# EAGLE board 14077-gatorBytes_button_board-panel-big (EAGLE 9.0.1)
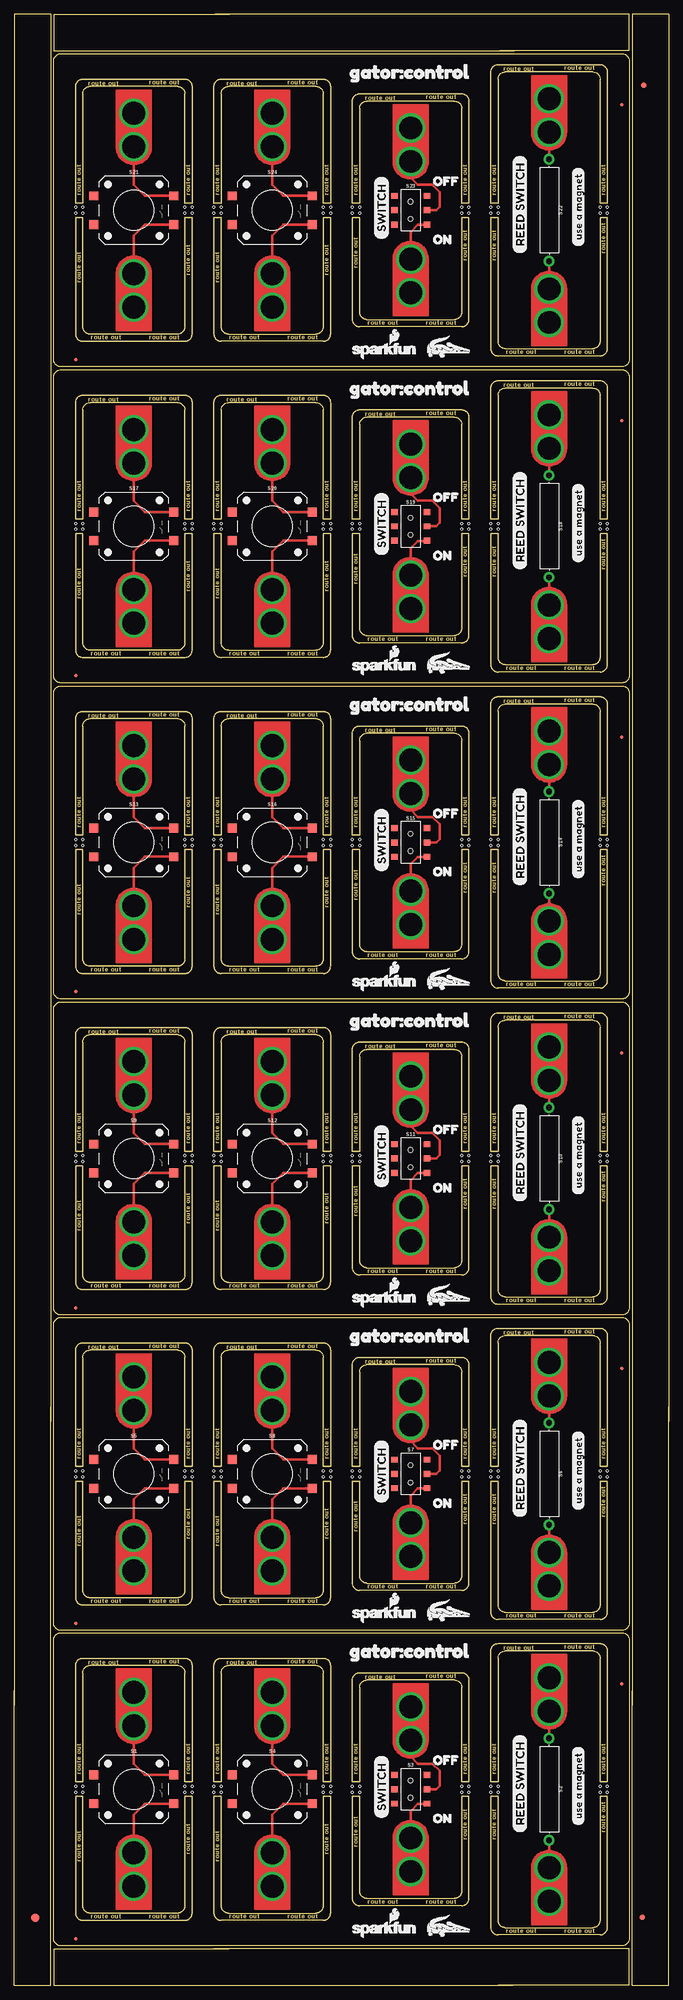
[diagram p0: board, top side]
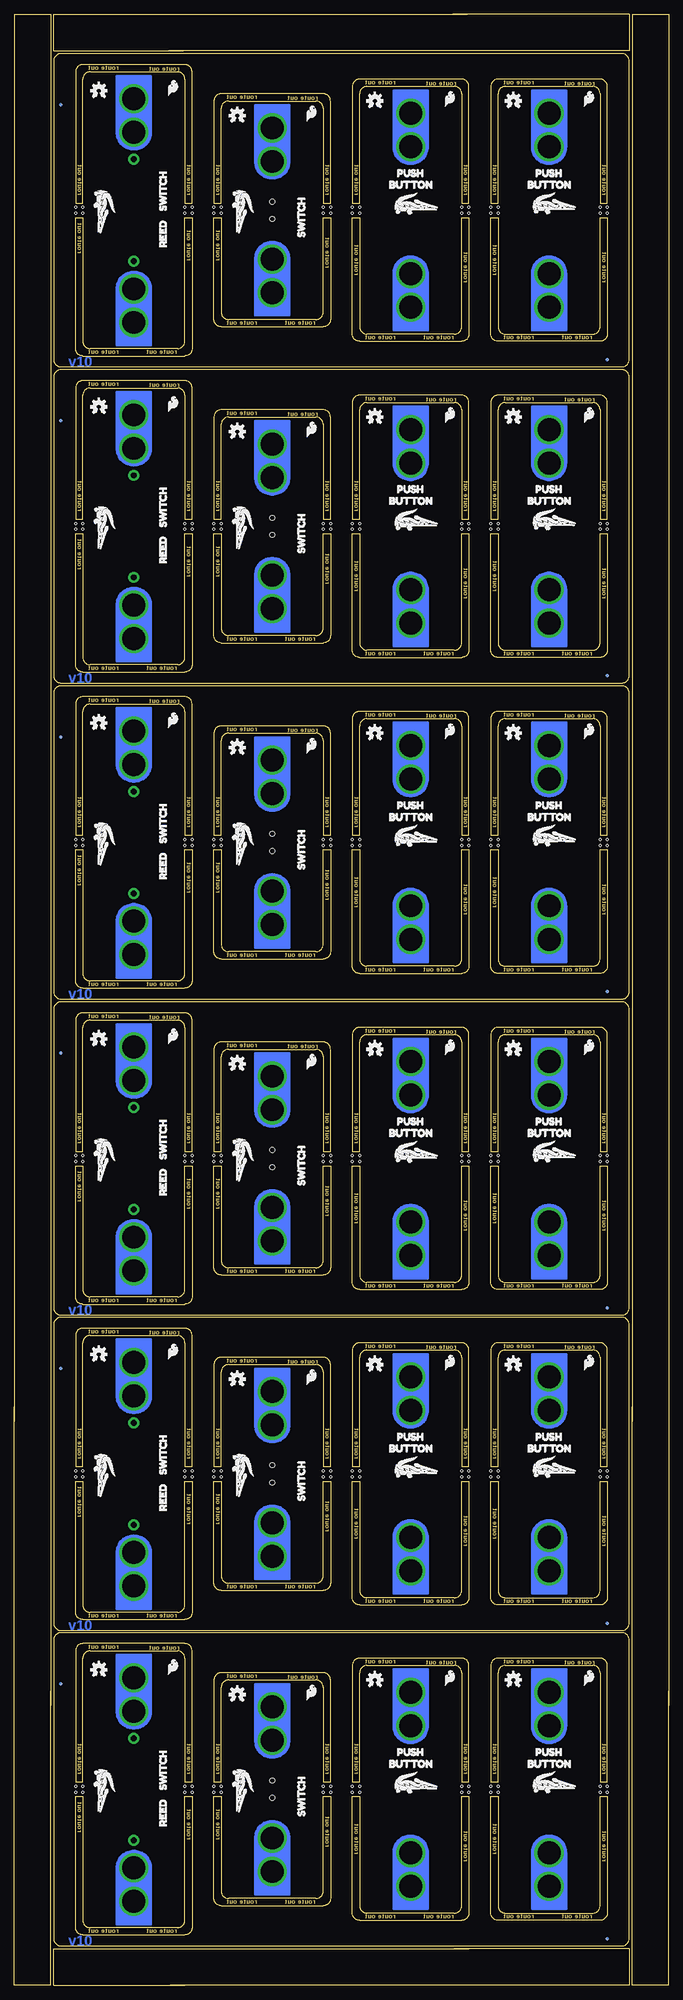
[diagram p1: board, bottom side, seen from below]

Size 114.05 x 343.66 mm. Coordinates in mm from the lower left corner, seen from the top.
Outline: 114.05,100.84 114.05,0 107.7,0 107.7,51.31
Outline: 107.7,48.77 107.7,343.66 114.05,343.66 114.05,98.3
Outline: 6.35,100.84 6.35,0 0,0 0,51.31
Outline: 0,48.77 0,343.66 6.35,343.66 6.35,98.3
Outline: 35.05,343.66 107.19,343.66 107.19,337.31 84.58,337.31
Outline: 87.12,337.31 6.86,337.31 6.86,343.66 37.59,343.66
Outline: 34.8,6.35 107.19,6.35 107.19,0 84.33,0
Outline: 86.87,0 6.86,0 6.86,6.35 37.34,6.35
Outline: 8.13,6.86 arc-90 6.86,8.13 6.86,60.2 arc-90 8.13,61.47 105.92,61.47 arc-90 107.19,60.2 107.19,8.13 arc-90 105.92,6.86 8.13,6.86
Outline: 28.45,55.75 arc-90 29.72,54.48 29.72,35.43 30.99,35.43 30.99,55.75 arc90 29.72,57.02 11.94,57.02 arc90 10.67,55.75 10.67,35.43 11.94,35.43 11.94,54.48 arc-90 13.21,55.75 28.45,55.75
Outline: 29.72,13.84 arc-90 28.45,12.57 13.21,12.57 arc-90 11.94,13.84 11.94,32.89 10.67,32.89 10.67,12.57 arc90 11.94,11.3 29.72,11.3 arc90 30.99,12.57 30.99,32.89 29.72,32.89 29.72,13.84
Outline: 52.58,55.75 arc-90 53.85,54.48 53.85,35.43 55.12,35.43 55.12,55.75 arc90 53.85,57.02 36.07,57.02 arc90 34.8,55.75 34.8,35.43 36.07,35.43 36.07,54.48 arc-90 37.34,55.75 52.58,55.75
Outline: 53.85,13.84 arc-90 52.58,12.57 37.34,12.57 arc-90 36.07,13.84 36.07,32.89 34.8,32.89 34.8,12.57 arc90 36.07,11.3 53.85,11.3 arc90 55.12,12.57 55.12,32.89 53.85,32.89 53.85,13.84
Outline: 76.71,53.21 arc-90 77.98,51.94 77.98,35.43 79.25,35.43 79.25,53.21 arc90 77.98,54.48 60.2,54.48 arc90 58.93,53.21 58.93,35.43 60.2,35.43 60.2,51.94 arc-90 61.47,53.21 76.71,53.21
Outline: 77.98,16.38 arc-90 76.71,15.11 61.47,15.11 arc-90 60.2,16.38 60.2,32.89 58.93,32.89 58.93,15.11 arc90 60.2,13.84 77.98,13.84 arc90 79.25,15.11 79.25,32.89 77.98,32.89 77.98,16.38
Outline: 100.84,58.29 arc-90 102.11,57.02 102.11,35.43 103.38,35.43 103.38,58.29 arc90 102.11,59.56 84.33,59.56 arc90 83.06,58.29 83.06,35.43 84.33,35.43 84.33,57.02 arc-90 85.6,58.29 100.84,58.29
Outline: 102.11,11.3 arc-90 100.84,10.03 85.6,10.03 arc-90 84.33,11.3 84.33,32.89 83.06,32.89 83.06,10.03 arc90 84.33,8.76 102.11,8.76 arc90 103.38,10.03 103.38,32.89 102.11,32.89 102.11,11.3
Outline: 8.13,61.85 arc-90 6.86,63.12 6.86,115.19 arc-90 8.13,116.46 105.92,116.46 arc-90 107.19,115.19 107.19,63.12 arc-90 105.92,61.85 8.13,61.85
Outline: 28.45,110.74 arc-90 29.72,109.47 29.72,90.42 30.99,90.42 30.99,110.74 arc90 29.72,112.01 11.94,112.01 arc90 10.67,110.74 10.67,90.42 11.94,90.42 11.94,109.47 arc-90 13.21,110.74 28.45,110.74
Outline: 29.72,68.83 arc-90 28.45,67.56 13.21,67.56 arc-90 11.94,68.83 11.94,87.88 10.67,87.88 10.67,67.56 arc90 11.94,66.29 29.72,66.29 arc90 30.99,67.56 30.99,87.88 29.72,87.88 29.72,68.83
Outline: 52.58,110.74 arc-90 53.85,109.47 53.85,90.42 55.12,90.42 55.12,110.74 arc90 53.85,112.01 36.07,112.01 arc90 34.8,110.74 34.8,90.42 36.07,90.42 36.07,109.47 arc-90 37.34,110.74 52.58,110.74
Outline: 53.85,68.83 arc-90 52.58,67.56 37.34,67.56 arc-90 36.07,68.83 36.07,87.88 34.8,87.88 34.8,67.56 arc90 36.07,66.29 53.85,66.29 arc90 55.12,67.56 55.12,87.88 53.85,87.88 53.85,68.83
Outline: 76.71,108.2 arc-90 77.98,106.93 77.98,90.42 79.25,90.42 79.25,108.2 arc90 77.98,109.47 60.2,109.47 arc90 58.93,108.2 58.93,90.42 60.2,90.42 60.2,106.93 arc-90 61.47,108.2 76.71,108.2
Outline: 77.98,71.37 arc-90 76.71,70.1 61.47,70.1 arc-90 60.2,71.37 60.2,87.88 58.93,87.88 58.93,70.1 arc90 60.2,68.83 77.98,68.83 arc90 79.25,70.1 79.25,87.88 77.98,87.88 77.98,71.37
Outline: 100.84,113.28 arc-90 102.11,112.01 102.11,90.42 103.38,90.42 103.38,113.28 arc90 102.11,114.55 84.33,114.55 arc90 83.06,113.28 83.06,90.42 84.33,90.42 84.33,112.01 arc-90 85.6,113.28 100.84,113.28
Outline: 102.11,66.29 arc-90 100.84,65.02 85.6,65.02 arc-90 84.33,66.29 84.33,87.88 83.06,87.88 83.06,65.02 arc90 84.33,63.75 102.11,63.75 arc90 103.38,65.02 103.38,87.88 102.11,87.88 102.11,66.29
Outline: 8.13,116.84 arc-90 6.86,118.11 6.86,170.18 arc-90 8.13,171.45 105.92,171.45 arc-90 107.19,170.18 107.19,118.11 arc-90 105.92,116.84 8.13,116.84
Outline: 28.45,165.74 arc-90 29.72,164.47 29.72,145.41 30.99,145.41 30.99,165.74 arc90 29.72,167 11.94,167 arc90 10.67,165.74 10.67,145.41 11.94,145.41 11.94,164.47 arc-90 13.21,165.74 28.45,165.74
Outline: 29.72,123.83 arc-90 28.45,122.56 13.21,122.56 arc-90 11.94,123.83 11.94,142.88 10.67,142.88 10.67,122.56 arc90 11.94,121.29 29.72,121.29 arc90 30.99,122.56 30.99,142.88 29.72,142.88 29.72,123.83
Outline: 52.58,165.74 arc-90 53.85,164.47 53.85,145.41 55.12,145.41 55.12,165.74 arc90 53.85,167 36.07,167 arc90 34.8,165.74 34.8,145.41 36.07,145.41 36.07,164.47 arc-90 37.34,165.74 52.58,165.74
Outline: 53.85,123.83 arc-90 52.58,122.56 37.34,122.56 arc-90 36.07,123.83 36.07,142.88 34.8,142.88 34.8,122.56 arc90 36.07,121.29 53.85,121.29 arc90 55.12,122.56 55.12,142.88 53.85,142.88 53.85,123.83
Outline: 76.71,163.19 arc-90 77.98,161.93 77.98,145.41 79.25,145.41 79.25,163.19 arc90 77.98,164.47 60.2,164.47 arc90 58.93,163.19 58.93,145.41 60.2,145.41 60.2,161.93 arc-90 61.47,163.19 76.71,163.19
Outline: 77.98,126.37 arc-90 76.71,125.09 61.47,125.09 arc-90 60.2,126.37 60.2,142.88 58.93,142.88 58.93,125.09 arc90 60.2,123.83 77.98,123.83 arc90 79.25,125.09 79.25,142.88 77.98,142.88 77.98,126.37
Outline: 100.84,168.28 arc-90 102.11,167 102.11,145.41 103.38,145.41 103.38,168.28 arc90 102.11,169.55 84.33,169.55 arc90 83.06,168.28 83.06,145.41 84.33,145.41 84.33,167 arc-90 85.6,168.28 100.84,168.28
Outline: 102.11,121.29 arc-90 100.84,120.02 85.6,120.02 arc-90 84.33,121.29 84.33,142.88 83.06,142.88 83.06,120.02 arc90 84.33,118.75 102.11,118.75 arc90 103.38,120.02 103.38,142.88 102.11,142.88 102.11,121.29
Outline: 8.13,171.96 arc-90 6.86,173.23 6.86,225.3 arc-90 8.13,226.57 105.92,226.57 arc-90 107.19,225.3 107.19,173.23 arc-90 105.92,171.96 8.13,171.96
Outline: 28.45,220.85 arc-90 29.72,219.58 29.72,200.53 30.99,200.53 30.99,220.85 arc90 29.72,222.12 11.94,222.12 arc90 10.67,220.85 10.67,200.53 11.94,200.53 11.94,219.58 arc-90 13.21,220.85 28.45,220.85
Outline: 29.72,178.94 arc-90 28.45,177.67 13.21,177.67 arc-90 11.94,178.94 11.94,197.99 10.67,197.99 10.67,177.67 arc90 11.94,176.4 29.72,176.4 arc90 30.99,177.67 30.99,197.99 29.72,197.99 29.72,178.94
Outline: 52.58,220.85 arc-90 53.85,219.58 53.85,200.53 55.12,200.53 55.12,220.85 arc90 53.85,222.12 36.07,222.12 arc90 34.8,220.85 34.8,200.53 36.07,200.53 36.07,219.58 arc-90 37.34,220.85 52.58,220.85
Outline: 53.85,178.94 arc-90 52.58,177.67 37.34,177.67 arc-90 36.07,178.94 36.07,197.99 34.8,197.99 34.8,177.67 arc90 36.07,176.4 53.85,176.4 arc90 55.12,177.67 55.12,197.99 53.85,197.99 53.85,178.94
Outline: 76.71,218.31 arc-90 77.98,217.04 77.98,200.53 79.25,200.53 79.25,218.31 arc90 77.98,219.58 60.2,219.58 arc90 58.93,218.31 58.93,200.53 60.2,200.53 60.2,217.04 arc-90 61.47,218.31 76.71,218.31
Outline: 77.98,181.48 arc-90 76.71,180.21 61.47,180.21 arc-90 60.2,181.48 60.2,197.99 58.93,197.99 58.93,180.21 arc90 60.2,178.94 77.98,178.94 arc90 79.25,180.21 79.25,197.99 77.98,197.99 77.98,181.48
Outline: 100.84,223.39 arc-90 102.11,222.12 102.11,200.53 103.38,200.53 103.38,223.39 arc90 102.11,224.66 84.33,224.66 arc90 83.06,223.39 83.06,200.53 84.33,200.53 84.33,222.12 arc-90 85.6,223.39 100.84,223.39
Outline: 102.11,176.4 arc-90 100.84,175.13 85.6,175.13 arc-90 84.33,176.4 84.33,197.99 83.06,197.99 83.06,175.13 arc90 84.33,173.86 102.11,173.86 arc90 103.38,175.13 103.38,197.99 102.11,197.99 102.11,176.4
Outline: 8.13,227.08 arc-90 6.86,228.35 6.86,280.42 arc-90 8.13,281.69 105.92,281.69 arc-90 107.19,280.42 107.19,228.35 arc-90 105.92,227.08 8.13,227.08
Outline: 28.45,275.97 arc-90 29.72,274.7 29.72,255.65 30.99,255.65 30.99,275.97 arc90 29.72,277.24 11.94,277.24 arc90 10.67,275.97 10.67,255.65 11.94,255.65 11.94,274.7 arc-90 13.21,275.97 28.45,275.97
Outline: 29.72,234.06 arc-90 28.45,232.79 13.21,232.79 arc-90 11.94,234.06 11.94,253.11 10.67,253.11 10.67,232.79 arc90 11.94,231.52 29.72,231.52 arc90 30.99,232.79 30.99,253.11 29.72,253.11 29.72,234.06
Outline: 52.58,275.97 arc-90 53.85,274.7 53.85,255.65 55.12,255.65 55.12,275.97 arc90 53.85,277.24 36.07,277.24 arc90 34.8,275.97 34.8,255.65 36.07,255.65 36.07,274.7 arc-90 37.34,275.97 52.58,275.97
Outline: 53.85,234.06 arc-90 52.58,232.79 37.34,232.79 arc-90 36.07,234.06 36.07,253.11 34.8,253.11 34.8,232.79 arc90 36.07,231.52 53.85,231.52 arc90 55.12,232.79 55.12,253.11 53.85,253.11 53.85,234.06
Outline: 76.71,273.43 arc-90 77.98,272.16 77.98,255.65 79.25,255.65 79.25,273.43 arc90 77.98,274.7 60.2,274.7 arc90 58.93,273.43 58.93,255.65 60.2,255.65 60.2,272.16 arc-90 61.47,273.43 76.71,273.43
Outline: 77.98,236.6 arc-90 76.71,235.33 61.47,235.33 arc-90 60.2,236.6 60.2,253.11 58.93,253.11 58.93,235.33 arc90 60.2,234.06 77.98,234.06 arc90 79.25,235.33 79.25,253.11 77.98,253.11 77.98,236.6
Outline: 100.84,278.51 arc-90 102.11,277.24 102.11,255.65 103.38,255.65 103.38,278.51 arc90 102.11,279.78 84.33,279.78 arc90 83.06,278.51 83.06,255.65 84.33,255.65 84.33,277.24 arc-90 85.6,278.51 100.84,278.51
Outline: 102.11,231.52 arc-90 100.84,230.25 85.6,230.25 arc-90 84.33,231.52 84.33,253.11 83.06,253.11 83.06,230.25 arc90 84.33,228.98 102.11,228.98 arc90 103.38,230.25 103.38,253.11 102.11,253.11 102.11,231.52
Outline: 8.13,282.19 arc-90 6.86,283.46 6.86,335.53 arc-90 8.13,336.8 105.92,336.8 arc-90 107.19,335.53 107.19,283.46 arc-90 105.92,282.19 8.13,282.19
Outline: 28.45,331.09 arc-90 29.72,329.82 29.72,310.77 30.99,310.77 30.99,331.09 arc90 29.72,332.36 11.94,332.36 arc90 10.67,331.09 10.67,310.77 11.94,310.77 11.94,329.82 arc-90 13.21,331.09 28.45,331.09
Outline: 29.72,289.18 arc-90 28.45,287.91 13.21,287.91 arc-90 11.94,289.18 11.94,308.23 10.67,308.23 10.67,287.91 arc90 11.94,286.64 29.72,286.64 arc90 30.99,287.91 30.99,308.23 29.72,308.23 29.72,289.18
Outline: 52.58,331.09 arc-90 53.85,329.82 53.85,310.77 55.12,310.77 55.12,331.09 arc90 53.85,332.36 36.07,332.36 arc90 34.8,331.09 34.8,310.77 36.07,310.77 36.07,329.82 arc-90 37.34,331.09 52.58,331.09
Outline: 53.85,289.18 arc-90 52.58,287.91 37.34,287.91 arc-90 36.07,289.18 36.07,308.23 34.8,308.23 34.8,287.91 arc90 36.07,286.64 53.85,286.64 arc90 55.12,287.91 55.12,308.23 53.85,308.23 53.85,289.18
Outline: 76.71,328.55 arc-90 77.98,327.28 77.98,310.77 79.25,310.77 79.25,328.55 arc90 77.98,329.82 60.2,329.82 arc90 58.93,328.55 58.93,310.77 60.2,310.77 60.2,327.28 arc-90 61.47,328.55 76.71,328.55
Outline: 77.98,291.72 arc-90 76.71,290.45 61.47,290.45 arc-90 60.2,291.72 60.2,308.23 58.93,308.23 58.93,290.45 arc90 60.2,289.18 77.98,289.18 arc90 79.25,290.45 79.25,308.23 77.98,308.23 77.98,291.72
Outline: 100.84,333.63 arc-90 102.11,332.36 102.11,310.77 103.38,310.77 103.38,333.63 arc90 102.11,334.9 84.33,334.9 arc90 83.06,333.63 83.06,310.77 84.33,310.77 84.33,332.36 arc-90 85.6,333.63 100.84,333.63
Outline: 102.11,286.64 arc-90 100.84,285.37 85.6,285.37 arc-90 84.33,286.64 84.33,308.23 83.06,308.23 83.06,285.37 arc90 84.33,284.1 102.11,284.1 arc90 103.38,285.37 103.38,308.23 102.11,308.23 102.11,286.64
Copper layers (1*16): Top 0.035mm / dielectric 1.5mm / Bottom 0.035mm
Design rules "SparkFun-2-layer-TIGHT": minimum track width 7mil, minimum drill 15mil, track to track 7mil, track to pad 7mil, pad to pad 7mil, via to via 7mil, smd to smd 7mil, copper to edge 7mil, drill to drill 7mil, minimum pad ring 7mil, minimum via ring 7mil, stop-mask expansion 4mil, vias tented up to drill 25mil, thermal gap 10mil
Holes 0.38 mm at 102.11,34.67 102.11,33.66 84.33,33.66 84.33,34.67 60.2,33.66 60.2,34.67 53.85,33.66 53.85,34.67 36.07,33.66 36.07,34.67 29.72,33.66 29.72,34.67 11.94,33.66 11.94,34.67 34.8,34.67 34.8,33.66 30.99,34.67 30.99,33.66 10.67,34.67 10.67,33.66 55.12,34.67 55.12,33.66 58.93,34.67 58.93,33.66 83.06,34.67 79.25,34.67 77.98,34.67 83.06,33.66 79.25,33.66 77.98,33.66 103.38,34.67 103.38,33.66 102.11,89.66 102.11,88.65 84.33,88.65 84.33,89.66 60.2,88.65 60.2,89.66 53.85,88.65 53.85,89.66 36.07,88.65 36.07,89.66 29.72,88.65 29.72,89.66 11.94,88.65 11.94,89.66 34.8,89.66 34.8,88.65 30.99,89.66 30.99,88.65 10.67,89.66 10.67,88.65 55.12,89.66 55.12,88.65 58.93,89.66 58.93,88.65 83.06,89.66 79.25,89.66 77.98,89.66 83.06,88.65 79.25,88.65 77.98,88.65 103.38,89.66 103.38,88.65 102.11,144.65 102.11,143.64 84.33,143.64 84.33,144.65 60.2,143.64 60.2,144.65 53.85,143.64 53.85,144.65 36.07,143.64 36.07,144.65 29.72,143.64 29.72,144.65 11.94,143.64 11.94,144.65 34.8,144.65 34.8,143.64 30.99,144.65 30.99,143.64 10.67,144.65 10.67,143.64 55.12,144.65 55.12,143.64 58.93,144.65 58.93,143.64 83.06,144.65 79.25,144.65 77.98,144.65 83.06,143.64 79.25,143.64 77.98,143.64 103.38,144.65 103.38,143.64 102.11,199.77 102.11,198.75 84.33,198.75 84.33,199.77 60.2,198.75 60.2,199.77 53.85,198.75 53.85,199.77 36.07,198.75 36.07,199.77 29.72,198.75 29.72,199.77 11.94,198.75 11.94,199.77 34.8,199.77 34.8,198.75 30.99,199.77 30.99,198.75 10.67,199.77 10.67,198.75 55.12,199.77 55.12,198.75 58.93,199.77 58.93,198.75 83.06,199.77 79.25,199.77 77.98,199.77 83.06,198.75 79.25,198.75 77.98,198.75 103.38,199.77 103.38,198.75 102.11,254.89 102.11,253.87 84.33,253.87 84.33,254.89 60.2,253.87 60.2,254.89 53.85,253.87 53.85,254.89 36.07,253.87 36.07,254.89 29.72,253.87 29.72,254.89 11.94,253.87 11.94,254.89 34.8,254.89 34.8,253.87 30.99,254.89 30.99,253.87 10.67,254.89 10.67,253.87 55.12,254.89 55.12,253.87 58.93,254.89 58.93,253.87 83.06,254.89 79.25,254.89 77.98,254.89 83.06,253.87 79.25,253.87 77.98,253.87 103.38,254.89 103.38,253.87 102.11,310.01 102.11,308.99 84.33,308.99 84.33,310.01 60.2,308.99 60.2,310.01 53.85,308.99 53.85,310.01 36.07,308.99 36.07,310.01 29.72,308.99 29.72,310.01 11.94,308.99 11.94,310.01 34.8,310.01 34.8,308.99 30.99,310.01 30.99,308.99 10.67,310.01 10.67,308.99 55.12,310.01 55.12,308.99 58.93,310.01 58.93,308.99 83.06,310.01 79.25,310.01 77.98,310.01 83.06,308.99 79.25,308.99 77.98,308.99 103.38,310.01 103.38,308.99

## Footprints (pad centres in the part's own frame; a part is rotated, then mirrored left to right if it is on the bottom)
FIDUCIAL-1X2 = smd 1 x 1: 1 0,0
FIDUCIAL-1.5X3 = smd 1.5 x 1.5: 1 0,0
FIDUCIAL-MICRO = smd 0.635 x 0.635: 1 0,0
TACTILE_SWITCH_SMD_12MM = smd 1.6 x 1.55: 1 6.975,-2.5; 2 -6.975,-2.5; 3 6.975,2.5; 4 -6.975,2.5
REED_SWITCH_PLASTIC = drill 1.016 pad 1.88: P$1 -8.89,0; P$2 8.89,0
SWITCH_DPDT_SMD_AYZ0202 = smd 1 x 1.15: 1 -2.5,2.825; 2 0,2.825; 3 2.5,2.825; 4 -2.5,-2.825; 5 0,-2.825; 6 2.5,-2.825 | hole 0.85: 1.5,0; -1.5,0
GATOR = drill 4 pad 5.08: P$1 0,-6.096; P$2 0,-0.254

## Placement (x,y rotation side)
E$1  [FIDUCIAL-1X2]  109.73,331.34 90 top
E$6  [FIDUCIAL-1.5X3]  3.68,11.75 180 top
E$7  [FIDUCIAL-1X2]  109.47,11.81 90 top
FD1  FIDUCIALUFIDUCIAL  [FIDUCIAL-MICRO]  105.92,52.58 0 top
FD2  FIDUCIALUFIDUCIAL  [FIDUCIAL-MICRO]  105.92,52.58 0 bottom
FD3  FIDUCIALUFIDUCIAL  [FIDUCIAL-MICRO]  10.67,8.13 0 bottom
FD4  FIDUCIALUFIDUCIAL  [FIDUCIAL-MICRO]  10.67,8.13 0 top
FD5  FIDUCIALUFIDUCIAL  [FIDUCIAL-MICRO]  105.92,107.57 0 top
FD6  FIDUCIALUFIDUCIAL  [FIDUCIAL-MICRO]  105.92,107.57 0 bottom
FD7  FIDUCIALUFIDUCIAL  [FIDUCIAL-MICRO]  10.67,63.12 0 bottom
FD8  FIDUCIALUFIDUCIAL  [FIDUCIAL-MICRO]  10.67,63.12 0 top
FD9  FIDUCIALUFIDUCIAL  [FIDUCIAL-MICRO]  105.92,162.56 0 top
FD10  FIDUCIALUFIDUCIAL  [FIDUCIAL-MICRO]  105.92,162.56 0 bottom
FD11  FIDUCIALUFIDUCIAL  [FIDUCIAL-MICRO]  10.67,118.11 0 bottom
FD12  FIDUCIALUFIDUCIAL  [FIDUCIAL-MICRO]  10.67,118.11 0 top
FD13  FIDUCIALUFIDUCIAL  [FIDUCIAL-MICRO]  105.92,217.68 0 top
FD14  FIDUCIALUFIDUCIAL  [FIDUCIAL-MICRO]  105.92,217.68 0 bottom
FD15  FIDUCIALUFIDUCIAL  [FIDUCIAL-MICRO]  10.67,173.23 0 bottom
FD16  FIDUCIALUFIDUCIAL  [FIDUCIAL-MICRO]  10.67,173.23 0 top
FD17  FIDUCIALUFIDUCIAL  [FIDUCIAL-MICRO]  105.92,272.8 0 top
FD18  FIDUCIALUFIDUCIAL  [FIDUCIAL-MICRO]  105.92,272.8 0 bottom
FD19  FIDUCIALUFIDUCIAL  [FIDUCIAL-MICRO]  10.67,228.35 0 bottom
FD20  FIDUCIALUFIDUCIAL  [FIDUCIAL-MICRO]  10.67,228.35 0 top
FD21  FIDUCIALUFIDUCIAL  [FIDUCIAL-MICRO]  105.92,327.91 0 top
FD22  FIDUCIALUFIDUCIAL  [FIDUCIAL-MICRO]  105.92,327.91 0 bottom
FD23  FIDUCIALUFIDUCIAL  [FIDUCIAL-MICRO]  10.67,283.46 0 bottom
FD24  FIDUCIALUFIDUCIAL  [FIDUCIAL-MICRO]  10.67,283.46 0 top
LOGO1  SFE_LOGO_FLAME.1_INCH  [SFE_LOGO_FLAME_.1]  63.37,49.4 0 bottom
LOGO2  OSHW-LOGOS  [OSHW-LOGO-S]  75.18,50.67 0 bottom
LOGO3  OSHW-LOGOS  [OSHW-LOGO-S]  51.18,53.21 0 bottom
LOGO4  SFE_LOGO_FLAME.1_INCH  [SFE_LOGO_FLAME_.1]  39.24,51.94 0 bottom
LOGO5  OSHW-LOGOS  [OSHW-LOGO-S]  27.05,53.21 0 bottom
LOGO6  SFE_LOGO_FLAME.1_INCH  [SFE_LOGO_FLAME_.1]  14.99,51.94 0 bottom
LOGO7  SFE_LOGO_FLAME.1_INCH  [SFE_LOGO_FLAME_.1]  87.5,53.85 0 bottom
LOGO8  OSHW-LOGOS  [OSHW-LOGO-S]  99.31,54.99 0 bottom
LOGO9  SFE_LOGO_FLAME.1_INCH  [SFE_LOGO_FLAME_.1]  63.37,104.39 0 bottom
LOGO10  OSHW-LOGOS  [OSHW-LOGO-S]  75.18,105.66 0 bottom
LOGO11  OSHW-LOGOS  [OSHW-LOGO-S]  51.18,108.2 0 bottom
LOGO12  SFE_LOGO_FLAME.1_INCH  [SFE_LOGO_FLAME_.1]  39.24,106.93 0 bottom
LOGO13  OSHW-LOGOS  [OSHW-LOGO-S]  27.05,108.2 0 bottom
LOGO14  SFE_LOGO_FLAME.1_INCH  [SFE_LOGO_FLAME_.1]  14.99,106.93 0 bottom
LOGO15  SFE_LOGO_FLAME.1_INCH  [SFE_LOGO_FLAME_.1]  87.5,108.84 0 bottom
LOGO16  OSHW-LOGOS  [OSHW-LOGO-S]  99.31,109.98 0 bottom
LOGO17  SFE_LOGO_FLAME.1_INCH  [SFE_LOGO_FLAME_.1]  63.37,159.38 0 bottom
LOGO18  OSHW-LOGOS  [OSHW-LOGO-S]  75.18,160.66 0 bottom
LOGO19  OSHW-LOGOS  [OSHW-LOGO-S]  51.18,163.19 0 bottom
LOGO20  SFE_LOGO_FLAME.1_INCH  [SFE_LOGO_FLAME_.1]  39.24,161.93 0 bottom
LOGO21  OSHW-LOGOS  [OSHW-LOGO-S]  27.05,163.19 0 bottom
LOGO22  SFE_LOGO_FLAME.1_INCH  [SFE_LOGO_FLAME_.1]  14.99,161.93 0 bottom
LOGO23  SFE_LOGO_FLAME.1_INCH  [SFE_LOGO_FLAME_.1]  87.5,163.83 0 bottom
LOGO24  OSHW-LOGOS  [OSHW-LOGO-S]  99.31,164.97 0 bottom
LOGO25  SFE_LOGO_FLAME.1_INCH  [SFE_LOGO_FLAME_.1]  63.37,214.5 0 bottom
LOGO26  OSHW-LOGOS  [OSHW-LOGO-S]  75.18,215.77 0 bottom
LOGO27  OSHW-LOGOS  [OSHW-LOGO-S]  51.18,218.31 0 bottom
LOGO28  SFE_LOGO_FLAME.1_INCH  [SFE_LOGO_FLAME_.1]  39.24,217.04 0 bottom
LOGO29  OSHW-LOGOS  [OSHW-LOGO-S]  27.05,218.31 0 bottom
LOGO30  SFE_LOGO_FLAME.1_INCH  [SFE_LOGO_FLAME_.1]  14.99,217.04 0 bottom
LOGO31  SFE_LOGO_FLAME.1_INCH  [SFE_LOGO_FLAME_.1]  87.5,218.95 0 bottom
LOGO32  OSHW-LOGOS  [OSHW-LOGO-S]  99.31,220.09 0 bottom
LOGO33  SFE_LOGO_FLAME.1_INCH  [SFE_LOGO_FLAME_.1]  63.37,269.62 0 bottom
LOGO34  OSHW-LOGOS  [OSHW-LOGO-S]  75.18,270.89 0 bottom
LOGO35  OSHW-LOGOS  [OSHW-LOGO-S]  51.18,273.43 0 bottom
LOGO36  SFE_LOGO_FLAME.1_INCH  [SFE_LOGO_FLAME_.1]  39.24,272.16 0 bottom
LOGO37  OSHW-LOGOS  [OSHW-LOGO-S]  27.05,273.43 0 bottom
LOGO38  SFE_LOGO_FLAME.1_INCH  [SFE_LOGO_FLAME_.1]  14.99,272.16 0 bottom
LOGO39  SFE_LOGO_FLAME.1_INCH  [SFE_LOGO_FLAME_.1]  87.5,274.07 0 bottom
LOGO40  OSHW-LOGOS  [OSHW-LOGO-S]  99.31,275.21 0 bottom
LOGO41  SFE_LOGO_FLAME.1_INCH  [SFE_LOGO_FLAME_.1]  63.37,324.74 0 bottom
LOGO42  OSHW-LOGOS  [OSHW-LOGO-S]  75.18,326.01 0 bottom
LOGO43  OSHW-LOGOS  [OSHW-LOGO-S]  51.18,328.55 0 bottom
LOGO44  SFE_LOGO_FLAME.1_INCH  [SFE_LOGO_FLAME_.1]  39.24,327.28 0 bottom
LOGO45  OSHW-LOGOS  [OSHW-LOGO-S]  27.05,328.55 0 bottom
LOGO46  SFE_LOGO_FLAME.1_INCH  [SFE_LOGO_FLAME_.1]  14.99,327.28 0 bottom
LOGO47  SFE_LOGO_FLAME.1_INCH  [SFE_LOGO_FLAME_.1]  87.5,329.18 0 bottom
LOGO48  OSHW-LOGOS  [OSHW-LOGO-S]  99.31,330.33 0 bottom
S1  MOMENTARY-SWITCH-SPST-SMD-12MM  [TACTILE_SWITCH_SMD_12MM]  20.83,34.16 0 top
S2  REED_SWITCH-PTH-INSULATED  [REED_SWITCH_PLASTIC]  93.22,34.16 270 top
S3  [SWITCH_DPDT_SMD_AYZ0202]  69.09,34.16 270 top
S4  MOMENTARY-SWITCH-SPST-SMD-12MM  [TACTILE_SWITCH_SMD_12MM]  44.96,34.16 0 top
S5  MOMENTARY-SWITCH-SPST-SMD-12MM  [TACTILE_SWITCH_SMD_12MM]  20.83,89.15 0 top
S6  REED_SWITCH-PTH-INSULATED  [REED_SWITCH_PLASTIC]  93.22,89.15 270 top
S7  [SWITCH_DPDT_SMD_AYZ0202]  69.09,89.15 270 top
S8  MOMENTARY-SWITCH-SPST-SMD-12MM  [TACTILE_SWITCH_SMD_12MM]  44.96,89.15 0 top
S9  MOMENTARY-SWITCH-SPST-SMD-12MM  [TACTILE_SWITCH_SMD_12MM]  20.83,144.15 0 top
S10  REED_SWITCH-PTH-INSULATED  [REED_SWITCH_PLASTIC]  93.22,144.15 270 top
S11  [SWITCH_DPDT_SMD_AYZ0202]  69.09,144.15 270 top
S12  MOMENTARY-SWITCH-SPST-SMD-12MM  [TACTILE_SWITCH_SMD_12MM]  44.96,144.15 0 top
S13  MOMENTARY-SWITCH-SPST-SMD-12MM  [TACTILE_SWITCH_SMD_12MM]  20.83,199.26 0 top
S14  REED_SWITCH-PTH-INSULATED  [REED_SWITCH_PLASTIC]  93.22,199.26 270 top
S15  [SWITCH_DPDT_SMD_AYZ0202]  69.09,199.26 270 top
S16  MOMENTARY-SWITCH-SPST-SMD-12MM  [TACTILE_SWITCH_SMD_12MM]  44.96,199.26 0 top
S17  MOMENTARY-SWITCH-SPST-SMD-12MM  [TACTILE_SWITCH_SMD_12MM]  20.83,254.38 0 top
S18  REED_SWITCH-PTH-INSULATED  [REED_SWITCH_PLASTIC]  93.22,254.38 270 top
S19  [SWITCH_DPDT_SMD_AYZ0202]  69.09,254.38 270 top
S20  MOMENTARY-SWITCH-SPST-SMD-12MM  [TACTILE_SWITCH_SMD_12MM]  44.96,254.38 0 top
S21  MOMENTARY-SWITCH-SPST-SMD-12MM  [TACTILE_SWITCH_SMD_12MM]  20.83,309.5 0 top
S22  REED_SWITCH-PTH-INSULATED  [REED_SWITCH_PLASTIC]  93.22,309.5 270 top
S23  [SWITCH_DPDT_SMD_AYZ0202]  69.09,309.5 270 top
S24  MOMENTARY-SWITCH-SPST-SMD-12MM  [TACTILE_SWITCH_SMD_12MM]  44.96,309.5 0 top
U$1  [GATOR#PNG]  98.23,34.23 270 bottom
U$2  [BUTTON3]  25.78,38.61 0 bottom
U$3  [PUSH4]  24.38,40.64 0 bottom
U$4  [PUSH4]  48.51,40.64 0 bottom
U$5  [BUTTON3]  49.91,38.61 0 bottom
U$6  [OFF9]  71.63,39.24 0 top
U$7  [REED_SWITCH0]  88.14,26.54 90 top
U$8  [SWITCH2]  64.01,29.08 90 top
U$9  [USE_A_MAGNET10]  98.3,27.81 90 top
U$10  GATOR  [GATOR]  44.96,44.96 180 top
U$11  GATOR  [GATOR]  20.83,44.96 180 top
U$12  GATOR  [GATOR]  93.22,20.7 0 top
U$13  [ON8]  71.63,29.08 0 top
U$14  GATOR  [GATOR]  69.09,25.91 0 top
U$15  GATOR  [GATOR]  69.09,42.42 180 top
U$16  GATOR  [GATOR]  93.22,47.5 180 top
U$17  GATOR  [GATOR]  20.83,23.37 0 top
U$18  [SWITCH5]  64.01,28.32 90 bottom
U$19  GATOR  [GATOR]  44.96,23.37 0 top
U$20  [REED6]  88.14,26.54 90 bottom
U$21  [SWITCH5]  88.14,32.89 90 bottom
U$22  [GATOR#PNG]  75.37,10.48 0 top
U$23  [GATOR#CONTROL0]  56.39,58.29 0 top
U$24  [SFE_LOGO_NAME_FLAME_.1]  58.55,8.13 0 top
U$25  [GATOR#PNG]  20.26,90.49 0 bottom
U$26  [GATOR#PNG]  44.32,90.42 0 bottom
U$27  [GATOR#PNG]  74.1,89.22 270 bottom
U$28  [GATOR#PNG]  44.32,35.43 0 bottom
U$29  [GATOR#PNG]  74.1,34.23 270 bottom
U$30  GATOR  [GATOR]  44.96,99.95 180 top
U$31  GATOR  [GATOR]  20.83,99.95 180 top
U$32  GATOR  [GATOR]  93.22,75.69 0 top
U$33  GATOR  [GATOR]  69.09,80.9 0 top
U$34  GATOR  [GATOR]  69.09,97.41 180 top
U$35  GATOR  [GATOR]  93.22,102.49 180 top
U$36  GATOR  [GATOR]  20.83,78.36 0 top
U$37  GATOR  [GATOR]  44.96,78.36 0 top
U$38  [GATOR#PNG]  98.23,89.22 270 bottom
U$39  [BUTTON3]  25.78,93.6 0 bottom
U$40  [PUSH4]  24.38,95.63 0 bottom
U$41  [PUSH4]  48.51,95.63 0 bottom
U$42  [BUTTON3]  49.91,93.6 0 bottom
U$43  [REED_SWITCH0]  88.14,81.53 90 top
U$44  [SWITCH2]  64.01,84.07 90 top
U$45  [USE_A_MAGNET10]  98.3,82.8 90 top
U$46  [OFF9]  71.63,94.23 0 top
U$47  [ON8]  71.63,84.07 0 top
U$48  [SWITCH5]  64.01,83.31 90 bottom
U$49  [REED6]  88.14,81.53 90 bottom
U$50  [SWITCH5]  88.14,87.88 90 bottom
U$51  [GATOR#PNG]  75.37,65.47 0 top
U$52  [GATOR#CONTROL0]  56.39,113.28 0 top
U$53  [SFE_LOGO_NAME_FLAME_.1]  58.55,63.12 0 top
U$54  [GATOR#PNG]  20.26,145.48 0 bottom
U$55  [GATOR#PNG]  44.32,145.41 0 bottom
U$56  [GATOR#PNG]  74.1,144.21 270 bottom
U$57  GATOR  [GATOR]  44.96,154.94 180 top
U$58  GATOR  [GATOR]  20.83,154.94 180 top
U$59  GATOR  [GATOR]  93.22,130.68 0 top
U$60  GATOR  [GATOR]  69.09,135.89 0 top
U$61  GATOR  [GATOR]  69.09,152.4 180 top
U$62  GATOR  [GATOR]  93.22,157.48 180 top
U$63  GATOR  [GATOR]  20.83,133.35 0 top
U$64  GATOR  [GATOR]  44.96,133.35 0 top
U$65  [GATOR#PNG]  98.23,144.21 270 bottom
U$66  [BUTTON3]  25.78,148.59 0 bottom
U$67  [PUSH4]  24.38,150.62 0 bottom
U$68  [PUSH4]  48.51,150.62 0 bottom
U$69  [BUTTON3]  49.91,148.59 0 bottom
U$70  [GATOR#PNG]  20.26,35.5 0 bottom
U$71  [REED_SWITCH0]  88.14,136.53 90 top
U$72  [SWITCH2]  64.01,139.06 90 top
U$73  [USE_A_MAGNET10]  98.3,137.8 90 top
U$74  [OFF9]  71.63,149.22 0 top
U$75  [ON8]  71.63,139.06 0 top
U$76  [SWITCH5]  64.01,138.3 90 bottom
U$77  [REED6]  88.14,136.53 90 bottom
U$78  [SWITCH5]  88.14,142.88 90 bottom
U$79  [GATOR#PNG]  75.37,120.46 0 top
U$80  [GATOR#CONTROL0]  56.39,168.28 0 top
U$81  [SFE_LOGO_NAME_FLAME_.1]  58.55,118.11 0 top
U$82  [GATOR#PNG]  20.26,200.6 0 bottom
U$83  [GATOR#PNG]  44.32,200.53 0 bottom
U$84  [GATOR#PNG]  74.1,199.33 270 bottom
U$85  GATOR  [GATOR]  44.96,210.06 180 top
U$86  GATOR  [GATOR]  20.83,210.06 180 top
U$87  GATOR  [GATOR]  93.22,185.8 0 top
U$88  GATOR  [GATOR]  69.09,191.01 0 top
U$89  GATOR  [GATOR]  69.09,207.52 180 top
U$90  GATOR  [GATOR]  93.22,212.6 180 top
U$91  GATOR  [GATOR]  20.83,188.47 0 top
U$92  GATOR  [GATOR]  44.96,188.47 0 top
U$93  [GATOR#PNG]  98.23,199.33 270 bottom
U$94  [BUTTON3]  25.78,203.71 0 bottom
U$95  [PUSH4]  24.38,205.74 0 bottom
U$96  [PUSH4]  48.51,205.74 0 bottom
U$97  [BUTTON3]  49.91,203.71 0 bottom
U$98  [REED_SWITCH0]  88.14,191.64 90 top
U$99  [SWITCH2]  64.01,194.18 90 top
U$100  [USE_A_MAGNET10]  98.3,192.91 90 top
U$101  [OFF9]  71.63,204.34 0 top
U$102  [ON8]  71.63,194.18 0 top
U$103  [SWITCH5]  64.01,193.42 90 bottom
U$104  [REED6]  88.14,191.64 90 bottom
U$105  [SWITCH5]  88.14,197.99 90 bottom
U$106  [GATOR#PNG]  75.37,175.58 0 top
U$107  [GATOR#CONTROL0]  56.39,223.39 0 top
U$108  [SFE_LOGO_NAME_FLAME_.1]  58.55,173.23 0 top
U$109  [GATOR#PNG]  20.26,255.71 0 bottom
U$110  [GATOR#PNG]  44.32,255.65 0 bottom
U$111  [GATOR#PNG]  74.1,254.44 270 bottom
U$112  GATOR  [GATOR]  44.96,265.18 180 top
U$113  GATOR  [GATOR]  20.83,265.18 180 top
U$114  GATOR  [GATOR]  93.22,240.92 0 top
U$115  GATOR  [GATOR]  69.09,246.13 0 top
U$116  GATOR  [GATOR]  69.09,262.64 180 top
U$117  GATOR  [GATOR]  93.22,267.72 180 top
U$118  GATOR  [GATOR]  20.83,243.59 0 top
U$119  GATOR  [GATOR]  44.96,243.59 0 top
U$120  [GATOR#PNG]  98.23,254.44 270 bottom
U$121  [BUTTON3]  25.78,258.83 0 bottom
U$122  [PUSH4]  24.38,260.86 0 bottom
U$123  [PUSH4]  48.51,260.86 0 bottom
U$124  [BUTTON3]  49.91,258.83 0 bottom
U$125  [REED_SWITCH0]  88.14,246.76 90 top
U$126  [SWITCH2]  64.01,249.3 90 top
U$127  [USE_A_MAGNET10]  98.3,248.03 90 top
U$128  [OFF9]  71.63,259.46 0 top
U$129  [ON8]  71.63,249.3 0 top
U$130  [SWITCH5]  64.01,248.54 90 bottom
U$131  [REED6]  88.14,246.76 90 bottom
U$132  [SWITCH5]  88.14,253.11 90 bottom
U$133  [GATOR#PNG]  75.37,230.7 0 top
U$134  [GATOR#CONTROL0]  56.39,278.51 0 top
U$135  [SFE_LOGO_NAME_FLAME_.1]  58.55,228.35 0 top
U$136  [GATOR#PNG]  20.26,310.83 0 bottom
U$137  [GATOR#PNG]  44.32,310.77 0 bottom
U$138  [GATOR#PNG]  74.1,309.56 270 bottom
U$139  GATOR  [GATOR]  44.96,320.29 180 top
U$140  GATOR  [GATOR]  20.83,320.29 180 top
U$141  GATOR  [GATOR]  93.22,296.04 0 top
U$142  GATOR  [GATOR]  69.09,301.24 0 top
U$143  GATOR  [GATOR]  69.09,317.75 180 top
U$144  GATOR  [GATOR]  93.22,322.83 180 top
U$145  GATOR  [GATOR]  20.83,298.7 0 top
U$146  GATOR  [GATOR]  44.96,298.7 0 top
U$147  [GATOR#PNG]  98.23,309.56 270 bottom
U$148  [BUTTON3]  25.78,313.94 0 bottom
U$149  [PUSH4]  24.38,315.98 0 bottom
U$150  [PUSH4]  48.51,315.98 0 bottom
U$151  [BUTTON3]  49.91,313.94 0 bottom
U$152  [REED_SWITCH0]  88.14,301.88 90 top
U$153  [SWITCH2]  64.01,304.42 90 top
U$154  [USE_A_MAGNET10]  98.3,303.15 90 top
U$155  [OFF9]  71.63,314.58 0 top
U$156  [ON8]  71.63,304.42 0 top
U$157  [SWITCH5]  64.01,303.66 90 bottom
U$158  [REED6]  88.14,301.88 90 bottom
U$159  [SWITCH5]  88.14,308.23 90 bottom
U$160  [GATOR#PNG]  75.37,285.81 0 top
U$161  [GATOR#CONTROL0]  56.39,333.63 0 top
U$162  [SFE_LOGO_NAME_FLAME_.1]  58.55,283.46 0 top

## Library data of the parts
E$1 E$7 FD1-FD24 LOGO1-LOGO48 U$24 U$53 U$81 U$108 U$135 U$162 = SparkFun-Aesthetics
E$6 = SparkFun-Retired
S1 S4 S5 S8 S9 S12 S13 S16 S17 S20 S21 S24 = SparkFun-Switches; PROD_ID: SWCH-11967; SF_SKU: COM-12993
S2 S6 S10 S14 S18 S22 = SparkFun-Switches; PROD_ID: SWCH-10467; SF_SKU: COM-10601
S3 S7 S11 S15 S19 S23 = SparkFun-Switches; PROD_ID: SWCH-08179; SF_ID: COM-00597
U$1 U$22 U$25-U$29 U$38 U$51 U$54-U$56 U$65 U$70 U$79 U$82-U$84 U$93 U$106 U$109-U$111 U$120 U$133 U$136-U$138 U$147 U$160 = gator#PNG (6)
U$2-U$9 U$13 U$18 U$20 U$21 U$39-U$50 U$66-U$69 U$71-U$78 U$94-U$105 U$121-U$132 U$148-U$159 = buzzard_labels (3)
U$10-U$12 U$14-U$17 U$19 U$30-U$37 U$57-U$64 U$85-U$92 U$112-U$119 U$139-U$146 = SparkFun-Connectors
U$23 U$52 U$80 U$107 U$134 U$161 = buzzard_labels (5)

## Nets
N$1: S4.1 U$19.P$1 U$19.P$2
N$2: S4.3 U$10.P$1 U$10.P$2
N$3: S1.1 U$17.P$1 U$17.P$2
N$4: S1.3 U$11.P$1 U$11.P$2
N$5: S2.P$1 U$16.P$1 U$16.P$2
N$6: S2.P$2 U$12.P$1 U$12.P$2
N$7: S3.2 U$15.P$1 U$15.P$2
N$8: S3.1
N$9: S3.3 U$14.P$1 U$14.P$2
N$10: S8.1 U$37.P$1 U$37.P$2
N$11: S8.3 U$30.P$1 U$30.P$2
N$12: S5.1 U$36.P$1 U$36.P$2
N$13: S5.3 U$31.P$1 U$31.P$2
N$14: S6.P$1 U$35.P$1 U$35.P$2
N$15: S6.P$2 U$32.P$1 U$32.P$2
N$16: S7.2 U$34.P$1 U$34.P$2
N$17: S7.1
N$18: S7.3 U$33.P$1 U$33.P$2
N$19: S12.1 U$64.P$1 U$64.P$2
N$20: S12.3 U$57.P$1 U$57.P$2
N$21: S9.1 U$63.P$1 U$63.P$2
N$22: S9.3 U$58.P$1 U$58.P$2
N$23: S10.P$1 U$62.P$1 U$62.P$2
N$24: S10.P$2 U$59.P$1 U$59.P$2
N$25: S11.2 U$61.P$1 U$61.P$2
N$26: S11.1
N$27: S11.3 U$60.P$1 U$60.P$2
N$28: S16.1 U$92.P$1 U$92.P$2
N$29: S16.3 U$85.P$1 U$85.P$2
N$30: S13.1 U$91.P$1 U$91.P$2
N$31: S13.3 U$86.P$1 U$86.P$2
N$32: S14.P$1 U$90.P$1 U$90.P$2
N$33: S14.P$2 U$87.P$1 U$87.P$2
N$34: S15.2 U$89.P$1 U$89.P$2
N$35: S15.1
N$36: S15.3 U$88.P$1 U$88.P$2
N$37: S20.1 U$119.P$1 U$119.P$2
N$38: S20.3 U$112.P$1 U$112.P$2
N$39: S17.1 U$118.P$1 U$118.P$2
N$40: S17.3 U$113.P$1 U$113.P$2
N$41: S18.P$1 U$117.P$1 U$117.P$2
N$42: S18.P$2 U$114.P$1 U$114.P$2
N$43: S19.2 U$116.P$1 U$116.P$2
N$44: S19.1
N$45: S19.3 U$115.P$1 U$115.P$2
N$46: S24.1 U$146.P$1 U$146.P$2
N$47: S24.3 U$139.P$1 U$139.P$2
N$48: S21.1 U$145.P$1 U$145.P$2
N$49: S21.3 U$140.P$1 U$140.P$2
N$50: S22.P$1 U$144.P$1 U$144.P$2
N$51: S22.P$2 U$141.P$1 U$141.P$2
N$52: S23.2 U$143.P$1 U$143.P$2
N$53: S23.1
N$54: S23.3 U$142.P$1 U$142.P$2

## Tracks (layer width: path | path; a pad name or v marks a point on that pad's centre or on a via)
N$1
  Top 0.203: U$19.P$2 U$19.P$1
  Top 0.406: U$19.P$2 44.96,29.72 46.9,31.66 S4.1
N$2
  Top 0.203: U$10.P$1 44.96,44.96 U$10.P$2
  Top 0.406: U$10.P$1 44.96,49.62 | S4.3 46.9,36.66 44.96,38.61 44.96,44.96
N$3
  Top 0.203: U$17.P$2 U$17.P$1
  Top 0.406: S1.1 22.77,31.66 20.83,29.72 U$17.P$2
N$4
  Top 0.203: U$11.P$1 20.83,44.96 U$11.P$2
  Top 0.406: S1.3 22.77,36.66 20.83,38.61 20.83,44.96
N$5
  Top 0.203: U$16.P$2 93.22,47.5
  Top 0.406: 93.22,46.23 93.22,47.5 | 93.22,47.5 U$16.P$1 | S2.P$1 93.22,47.5
N$6
  Top 0.406: S2.P$2 93.22,22.1 | 93.22,22.1 U$12.P$1 | U$12.P$2 93.22,22.1
N$7
  Top 0.203: 69.09,39.88 U$15.P$1 69.09,45.85 68.83,45.59
  Top 0.406: 67.82,45.59 68.83,45.59 68.96,45.59 68.97,45.59 | S3.2 73.53,34.16 74.17,34.8 74.17,37.34 72.9,38.61 70.36,38.61 69.09,39.88 U$15.P$2
N$9
  Top 0.406: S3.3 71.87,31.62 70.36,31.62 69.09,30.35 69.09,24.64 U$14.P$2 U$14.P$1
N$10
  Top 0.203: U$37.P$2 U$37.P$1
  Top 0.406: U$37.P$2 44.96,84.71 46.9,86.65 S8.1
N$11
  Top 0.203: U$30.P$1 44.96,99.95 U$30.P$2
  Top 0.406: U$30.P$1 44.96,104.62 | S8.3 46.9,91.65 44.96,93.6 44.96,99.95
N$12
  Top 0.203: U$36.P$2 U$36.P$1
  Top 0.406: S5.1 22.77,86.65 20.83,84.71 U$36.P$2
N$13
  Top 0.203: U$31.P$1 20.83,99.95 U$31.P$2
  Top 0.406: S5.3 22.77,91.65 20.83,93.6 20.83,99.95
N$14
  Top 0.203: U$35.P$2 93.22,102.49
  Top 0.406: 93.22,101.22 93.22,102.49 | 93.22,102.49 U$35.P$1 | S6.P$1 93.22,102.49
N$15
  Top 0.406: S6.P$2 93.22,77.09 | 93.22,77.09 U$32.P$1 | U$32.P$2 93.22,77.09
N$16
  Top 0.203: 69.09,94.87 U$34.P$1 69.09,100.84 68.83,100.58
  Top 0.406: 67.82,100.58 68.83,100.58 68.96,100.58 68.97,100.58 | S7.2 73.53,89.15 74.17,89.79 74.17,92.33 72.9,93.6 70.36,93.6 69.09,94.87 U$34.P$2
N$18
  Top 0.406: S7.3 71.87,86.61 70.36,86.61 69.09,85.34 69.09,79.63 U$33.P$2 U$33.P$1
N$19
  Top 0.203: U$64.P$2 U$64.P$1
  Top 0.406: U$64.P$2 44.96,139.7 46.9,141.65 S12.1
N$20
  Top 0.203: U$57.P$1 44.96,154.94 U$57.P$2
  Top 0.406: U$57.P$1 44.96,159.61 | S12.3 46.9,146.65 44.96,148.59 44.96,154.94
N$21
  Top 0.203: U$63.P$2 U$63.P$1
  Top 0.406: S9.1 22.77,141.65 20.83,139.7 U$63.P$2
N$22
  Top 0.203: U$58.P$1 20.83,154.94 U$58.P$2
  Top 0.406: S9.3 22.77,146.65 20.83,148.59 20.83,154.94
N$23
  Top 0.203: U$62.P$2 93.22,157.48
  Top 0.406: 93.22,156.21 93.22,157.48 | 93.22,157.48 U$62.P$1 | S10.P$1 93.22,157.48
N$24
  Top 0.406: S10.P$2 93.22,132.08 | 93.22,132.08 U$59.P$1 | U$59.P$2 93.22,132.08
N$25
  Top 0.203: 69.09,149.86 U$61.P$1 69.09,155.83 68.83,155.58
  Top 0.406: 67.82,155.58 68.83,155.58 68.96,155.58 68.97,155.58 | S11.2 73.53,144.15 74.17,144.78 74.17,147.32 72.9,148.59 70.36,148.59 69.09,149.86 U$61.P$2
N$27
  Top 0.406: S11.3 71.87,141.61 70.36,141.61 69.09,140.34 69.09,134.62 U$60.P$2 U$60.P$1
N$28
  Top 0.203: U$92.P$2 U$92.P$1
  Top 0.406: U$92.P$2 44.96,194.82 46.9,196.76 S16.1
N$29
  Top 0.203: U$85.P$1 44.96,210.06 U$85.P$2
  Top 0.406: U$85.P$1 44.96,214.73 | S16.3 46.9,201.76 44.96,203.71 44.96,210.06
N$30
  Top 0.203: U$91.P$2 U$91.P$1
  Top 0.406: S13.1 22.77,196.76 20.83,194.82 U$91.P$2
N$31
  Top 0.203: U$86.P$1 20.83,210.06 U$86.P$2
  Top 0.406: S13.3 22.77,201.76 20.83,203.71 20.83,210.06
N$32
  Top 0.203: U$90.P$2 93.22,212.6
  Top 0.406: 93.22,211.33 93.22,212.6 | 93.22,212.6 U$90.P$1 | S14.P$1 93.22,212.6
N$33
  Top 0.406: S14.P$2 93.22,187.2 | 93.22,187.2 U$87.P$1 | U$87.P$2 93.22,187.2
N$34
  Top 0.203: 69.09,204.98 U$89.P$1 69.09,210.95 68.83,210.69
  Top 0.406: 67.82,210.69 68.83,210.69 68.96,210.69 68.97,210.69 | S15.2 73.53,199.26 74.17,199.9 74.17,202.44 72.9,203.71 70.36,203.71 69.09,204.98 U$89.P$2
N$36
  Top 0.406: S15.3 71.87,196.72 70.36,196.72 69.09,195.45 69.09,189.74 U$88.P$2 U$88.P$1
N$37
  Top 0.203: U$119.P$2 U$119.P$1
  Top 0.406: U$119.P$2 44.96,249.94 46.9,251.88 S20.1
N$38
  Top 0.203: U$112.P$1 44.96,265.18 U$112.P$2
  Top 0.406: U$112.P$1 44.96,269.84 | S20.3 46.9,256.88 44.96,258.83 44.96,265.18
N$39
  Top 0.203: U$118.P$2 U$118.P$1
  Top 0.406: S17.1 22.77,251.88 20.83,249.94 U$118.P$2
N$40
  Top 0.203: U$113.P$1 20.83,265.18 U$113.P$2
  Top 0.406: S17.3 22.77,256.88 20.83,258.83 20.83,265.18
N$41
  Top 0.203: U$117.P$2 93.22,267.72
  Top 0.406: 93.22,266.45 93.22,267.72 | 93.22,267.72 U$117.P$1 | S18.P$1 93.22,267.72
N$42
  Top 0.406: S18.P$2 93.22,242.32 | 93.22,242.32 U$114.P$1 | U$114.P$2 93.22,242.32
N$43
  Top 0.203: 69.09,260.1 U$116.P$1 69.09,266.06 68.83,265.81
  Top 0.406: 67.82,265.81 68.83,265.81 68.96,265.81 68.97,265.81 | S19.2 73.53,254.38 74.17,255.02 74.17,257.56 72.9,258.83 70.36,258.83 69.09,260.1 U$116.P$2
N$45
  Top 0.406: S19.3 71.87,251.84 70.36,251.84 69.09,250.57 69.09,244.86 U$115.P$2 U$115.P$1
N$46
  Top 0.203: U$146.P$2 U$146.P$1
  Top 0.406: U$146.P$2 44.96,305.05 46.9,307 S24.1
N$47
  Top 0.203: U$139.P$1 44.96,320.29 U$139.P$2
  Top 0.406: U$139.P$1 44.96,324.96 | S24.3 46.9,312 44.96,313.94 44.96,320.29
N$48
  Top 0.203: U$145.P$2 U$145.P$1
  Top 0.406: S21.1 22.77,307 20.83,305.05 U$145.P$2
N$49
  Top 0.203: U$140.P$1 20.83,320.29 U$140.P$2
  Top 0.406: S21.3 22.77,312 20.83,313.94 20.83,320.29
N$50
  Top 0.203: U$144.P$2 93.22,322.83
  Top 0.406: 93.22,321.56 93.22,322.83 | 93.22,322.83 U$144.P$1 | S22.P$1 93.22,322.83
N$51
  Top 0.406: S22.P$2 93.22,297.43 | 93.22,297.43 U$141.P$1 | U$141.P$2 93.22,297.43
N$52
  Top 0.203: 69.09,315.21 U$143.P$1 69.09,321.18 68.83,320.93
  Top 0.406: 67.82,320.93 68.83,320.93 68.96,320.93 68.97,320.93 | S23.2 73.53,309.5 74.17,310.13 74.17,312.67 72.9,313.94 70.36,313.94 69.09,315.21 U$143.P$2
N$54
  Top 0.406: S23.3 71.87,306.96 70.36,306.96 69.09,305.69 69.09,299.97 U$142.P$2 U$142.P$1

## Text on the board
Bottom: v10 | v10 | v10 | v10 | v10 | v10
Dimension: route out | route out | route out | route out | route out | route out | route out | route out | route out | route out | route out | route out | route out | route out | route out | route out | route out | route out | route out | route out | route out | route out | route out | route out | route out | route out | route out | route out | route out | route out | route out | route out | route out | route out | route out | route out | route out | route out | route out | route out | route out | route out | route out | route out | route out | route out | route out | route out | route out | route out | route out | route out | route out | route out | route out | route out | route out | route out | route out | route out | route out | route out | route out | route out | route out | route out | route out | route out | route out | route out | route out | route out | route out | route out | route out | route out | route out | route out | route out | route out | route out | route out | route out | route out | route out | route out | route out | route out | route out | route out | route out | route out | route out | route out | route out | route out | route out | route out | route out | route out | route out | route out | route out | route out | route out | route out | route out | route out | route out | route out | route out | route out | route out | route out | route out | route out | route out | route out | route out | route out | route out | route out | route out | route out | route out | route out | route out | route out | route out | route out | route out | route out | route out | route out | route out | route out | route out | route out | route out | route out | route out | route out | route out | route out | route out | route out | route out | route out | route out | route out | route out | route out | route out | route out | route out | route out | route out | route out | route out | route out | route out | route out | route out | route out | route out | route out | route out | route out | route out | route out | route out | route out | route out | route out | route out | route out | route out | route out | route out | route out | route out | route out | route out | route out | route out | route out | route out | route out | route out | route out | route out | route out